# Altium PCB Power.PcbDoc
Units mil, origin at the board's own origin, x right, y up, seen from the top; angles counter-clockwise.
Board outline 1500 x 1000 mil, 2 copper layers (Top Layer, Bottom Layer); 9 components, 6 nets, 20 pads, 0 vias.
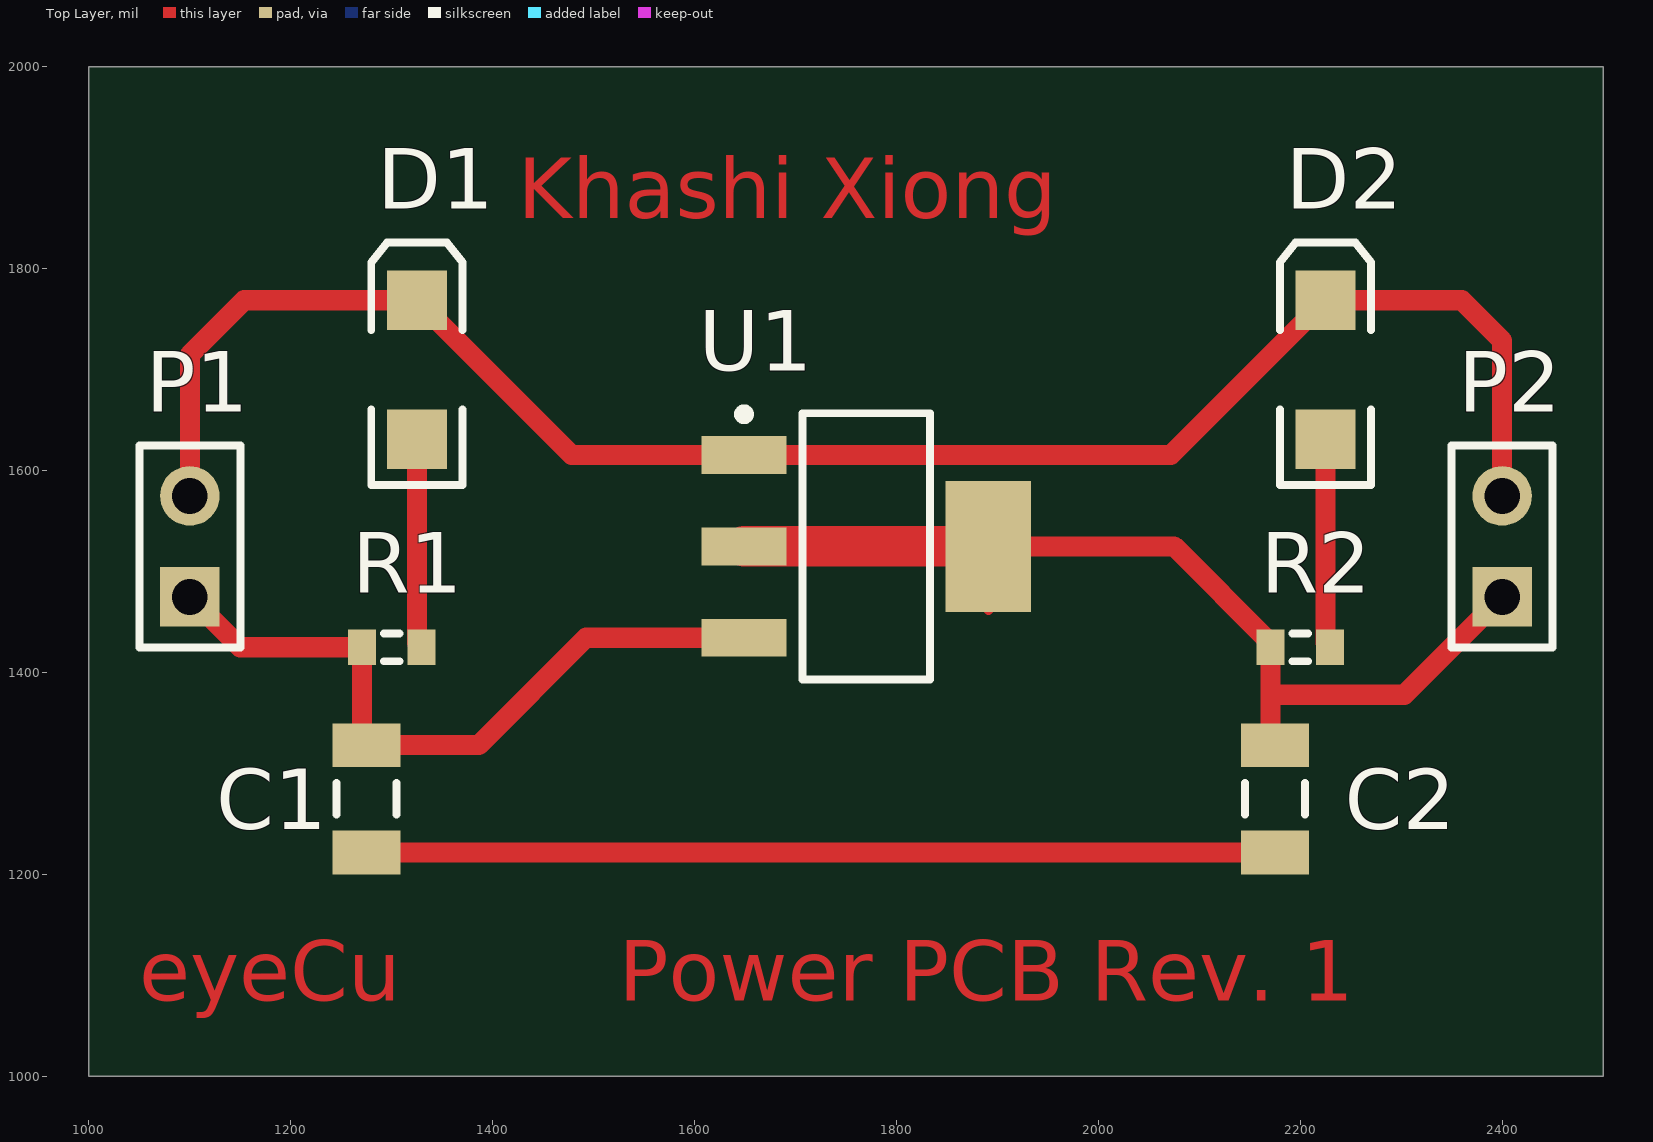
[diagram p0: Top Layer view]
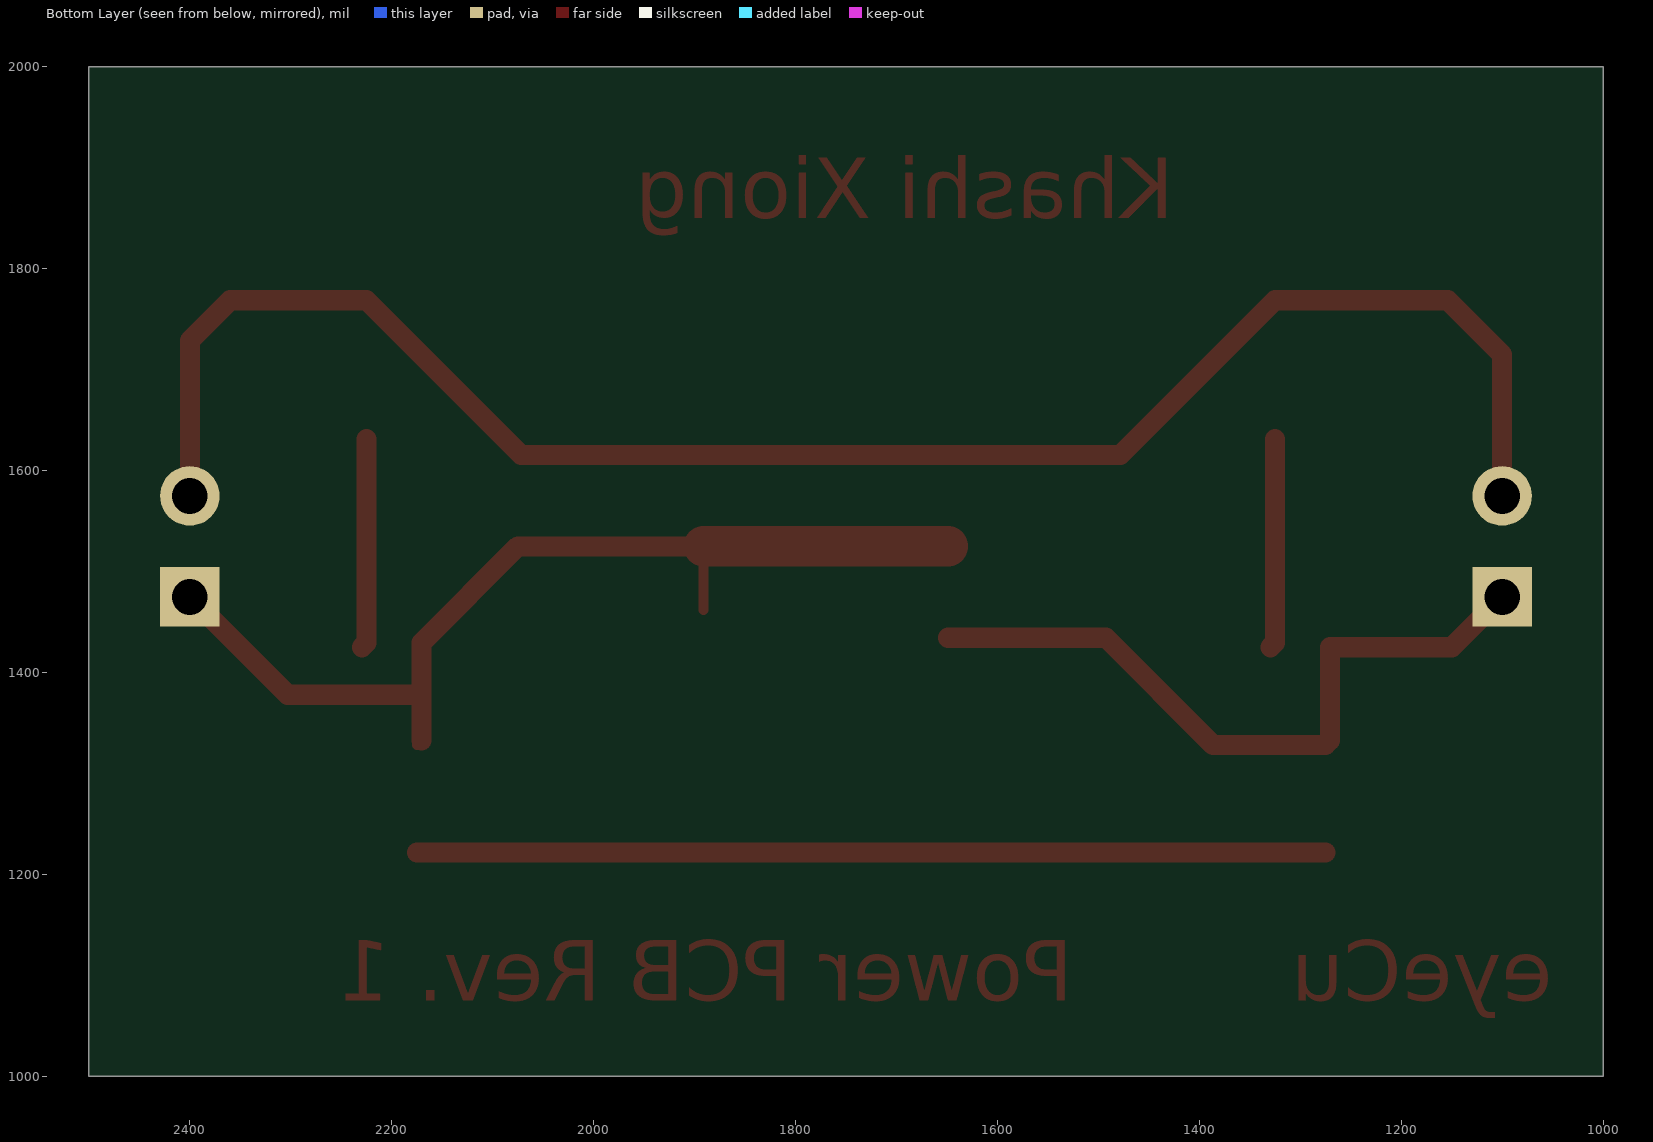
[diagram p1: Bottom Layer view, seen from below]

## Layer stack, top to bottom
Top Layer: signal copper 1.4
Dielectric: core 12.6, FR-4, Dk 4.8
Bottom Layer: signal copper 1.4

## Board outline
1000,1000 1000,2000 2500,2000 2500,1000

## Design rules (kind name [scope] priority, off if disabled: settings)
Clearance [All] p1: gap=10
PolygonConnect [All] p1: connectstyle=Relief reliefconductorwidth=10 reliefentries=4 polygonreliefangle="90 Angle"
RoutingVias [All] p1: holewidth=28 width=50 viastyle="Through Hole" minholewidth=28 minwidth=50 maxholewidth=28 maxwidth=50
SilkscreenOverComponentPads [All] p1: minsilkscreentomaskgap=10
SolderMaskExpansion [All] p1: expansion=4
Width [All] p1: maxlimit=20 minlimit=20 preferedwidth=20
27 further rules are at their usual default settings.

## Classes and differential pairs
component class Power: C1 C2 D1 D2 P1 P2 R2 U1

## Components (designator, comment, footprint, x,y, rotation, side; value= is the part's Value field where it differs from the comment)
C1 "Tantalum" C1206#1 1275,1275 r90 top
C2 "Tantalum" C1206#2 2175,1275 r90 top
D1 "LED2" 3.2X1.6X1.1 1325,1700 r90 top
D2 "LED2" 3.2X1.6X1.1 2225,1700 r90 top
P1 "Header 2" HDR1X2 1100,1475 r90 top
P2 "Header 2" HDR1X2 2400,1475 r90 top
R1 "Res3" J1-0603 1300,1425 r0 top
R2 "Res3" J1-0603 2200,1425 r0 top
U1 "REG1117-5" SOT230P710X180-4N 1770,1525 r0 top

## Footprints (in the part's own frame and the unit in brackets; to place one, negate y for a bottom-side part, rotate by r counter-clockwise, add the part's x,y. Pads: shape width x height; smd on the part's side, far side on the other; paste and mask are expansions set on the pad)
3.2X1.6X1.1 [mm] "SMT LED; 2 Flat Leads"
  rect 1.5x1.5 smd: 1(-1.75,0) 2(1.75,0)
  silkscreen extent -2.9,-1.15 3.2,1.15
C1206#1 [mm] "Chip Capacitor, Body 3.2x1.6mm, IPC High Density"
  rect 1.1x1.7 smd: 1(-1.35,0) 1(1.35,0)
  silkscreen extent -0.4,-0.75 0.4,0.75, body extent -1.7,-0.9 1.7,0.9, height 1.3
C1206#2 [mm] "Chip Capacitor, Body 3.2x1.6mm, IPC High Density"
  rect 1.1x1.7 smd: 1(-1.35,0) 2(1.35,0)
  silkscreen extent -0.4,-0.75 0.4,0.75, body extent -1.7,-0.9 1.7,0.9, height 1.3
HDR1X2 [mm] "Connector; Header; 2 Position"
  rect 1.5x1.5 hole 0.9: 1(0,0)
  round 1.5 hole 0.9: 2(2.54,0)
  silkscreen extent -1.27,-1.27 3.81,1.27
J1-0603 [mm] "Chip Resistor, Body 1.6x0.8mm, IPC High Density"
  rect 0.7x0.9 smd: 1(-0.75,0) 2(0.75,0)
  silkscreen extent -0.2,-0.35 0.2,0.35, body extent -0.85,-0.48 0.85,0.48, height 0.9
SOT230P710X180-4N [mm] "SOT223, 4-Leads, Body 6.7x7.5mm (max), Pitch 2.30mm, IPC Medium Density"
  rect 2.15x0.95 smd: 1(-3.075,2.3) 2(-3.075,0) 3(-3.075,-2.3)
  rect 2.15x3.3 smd: 4(3.075,0)
  silkscreen extent -3.2,-3.35 1.6,3.45, body extent -1.85,-3.35 1.85,3.35, height 1.8

## Part data
C1 C2: library part "Cap Semi", "Capacitor (Semiconductor SIM Model)"
D1 D2: "Typical RED, GREEN, YELLOW, AMBER GaAs LED"
P1 P2: "Header, 2-Pin"
R1 R2: "Resistor"
U1: "REG1117-5, Voltage Regulator, 5V Out, 800mA"

## Nets (pads, with @x,y where several pads share a name; then routed paths per layer and width w, separated by ;. In a path a pad name is that pad's centre, name@x,y a point inside that pad or via, vN(x,y) a via of type N, cw(c..) or ccw(c..) an arc to the next point about the centre after c; other vN are vias at no path point)
5V: C2.2 P2.1 R2.1 U1.2 U1.4 | length 997
  Top Layer w10: U1.4@1891.06,1462 U1.4 ; C2.2@2170.47,1332.68 C2.2 ; R2.1 R2.1@2170.47,1429.53
  Top Layer w20: U1.4 2075,1525 R2.1@2170.47,1429.53 ; C2.2@2170.47,1332.68 R2.1 ; 2170.47,1378 2303,1378 P2.1
  Top Layer w40: U1.2 U1.4
6V: C1.1@1275,1328.15 P1.1 R1.1 U1.3 | length 707.9
  Top Layer w10: C1.1@1270.47,1332.68 C1.1@1275,1328.15
  Top Layer w20: P1.1 1150,1425 R1.1 C1.1@1270.47,1332.68 ; C1.1@1275,1328.15 1386.15,1328.15 1492.45,1434.45 U1.3
GND: D1.2 D2.2 P1.2 P2.2 U1.1 | length 1759.8
  Top Layer w20: P1.2 1100,1715 1153.9,1768.9 D1.2 1478.35,1615.55 U1.1 2071.65,1615.55 D2.2 2360,1768.9 2400,1728.9 P2.2
NetC1_1: C1.1@1275,1221.85 C2.1 | length 900
  Top Layer w20: C1.1@1275,1221.85 C2.1
NetD1_1: D1.1 R1.2 | length 208
  Top Layer w20: D1.1 1325,1429.53 R1.2
NetD2_1: D2.1 R2.2 | length 208
  Top Layer w20: D2.1 2225,1429.53 R2.2

## Other copper
Top Layer:
  text "Khashi Xiong" at 1425,1850 h60
  text "eyeCu" at 1050,1075 h60
  text "Power PCB Rev. 1" at 1525,1075 h60